# Altium PCB Commit.PcbDoc
Units mm, origin at the board's own origin, x right, y up, seen from the top; angles counter-clockwise.
Board outline 42 x 80 mm, 2 copper layers (Top Layer, Bottom Layer); 82 components, 52 nets, 246 pads, 237 vias.
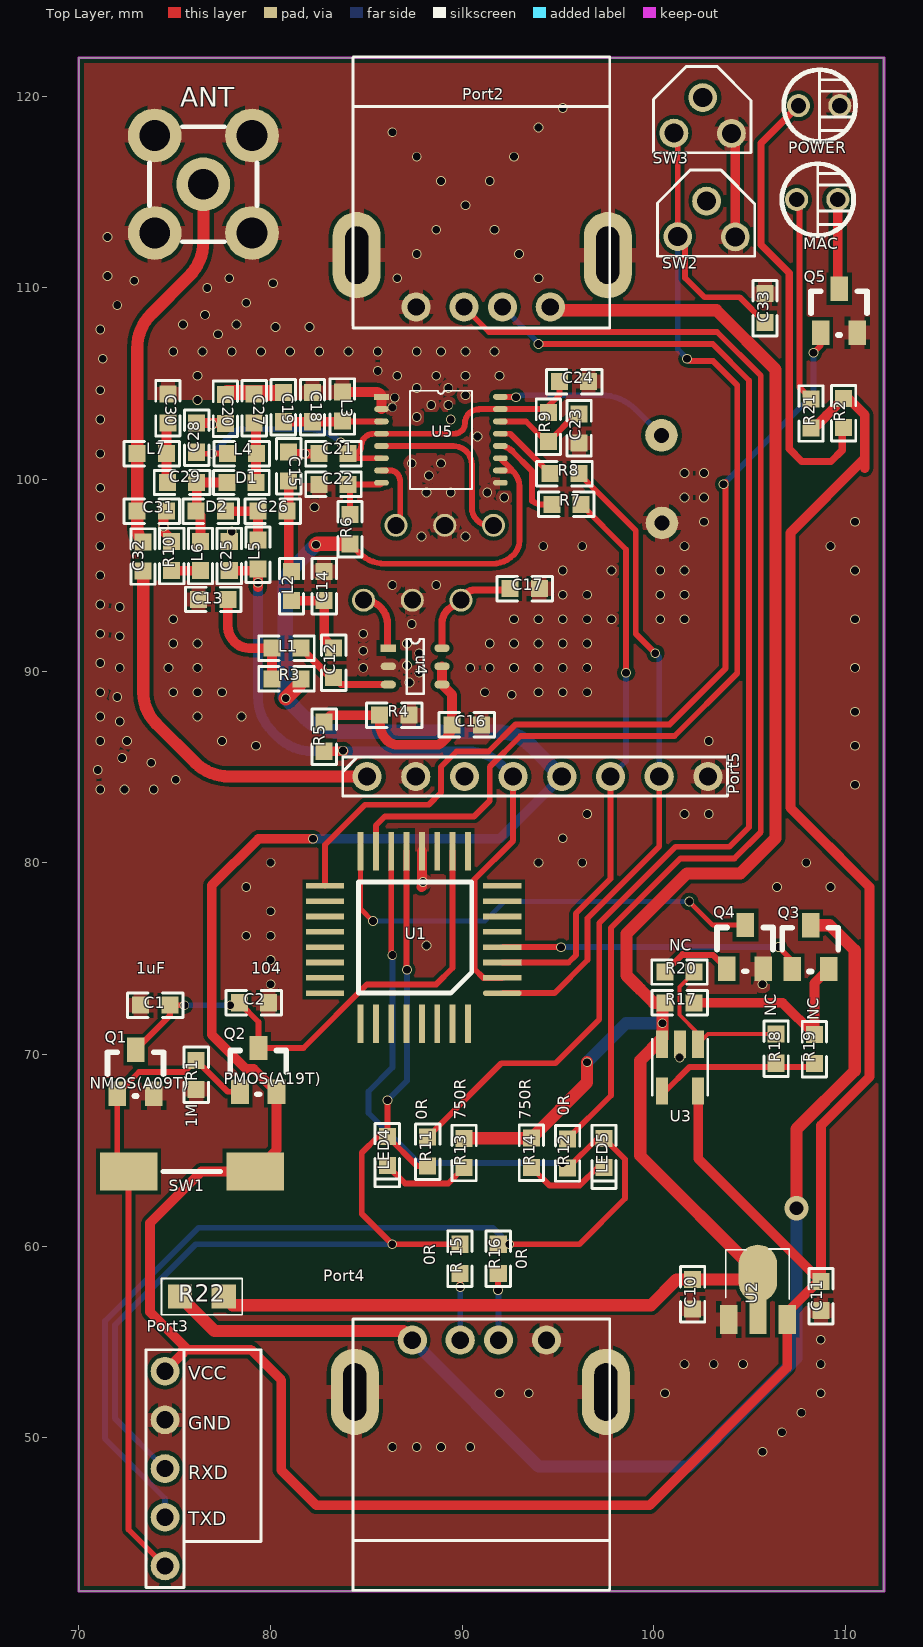
[diagram p0: Top Layer view]
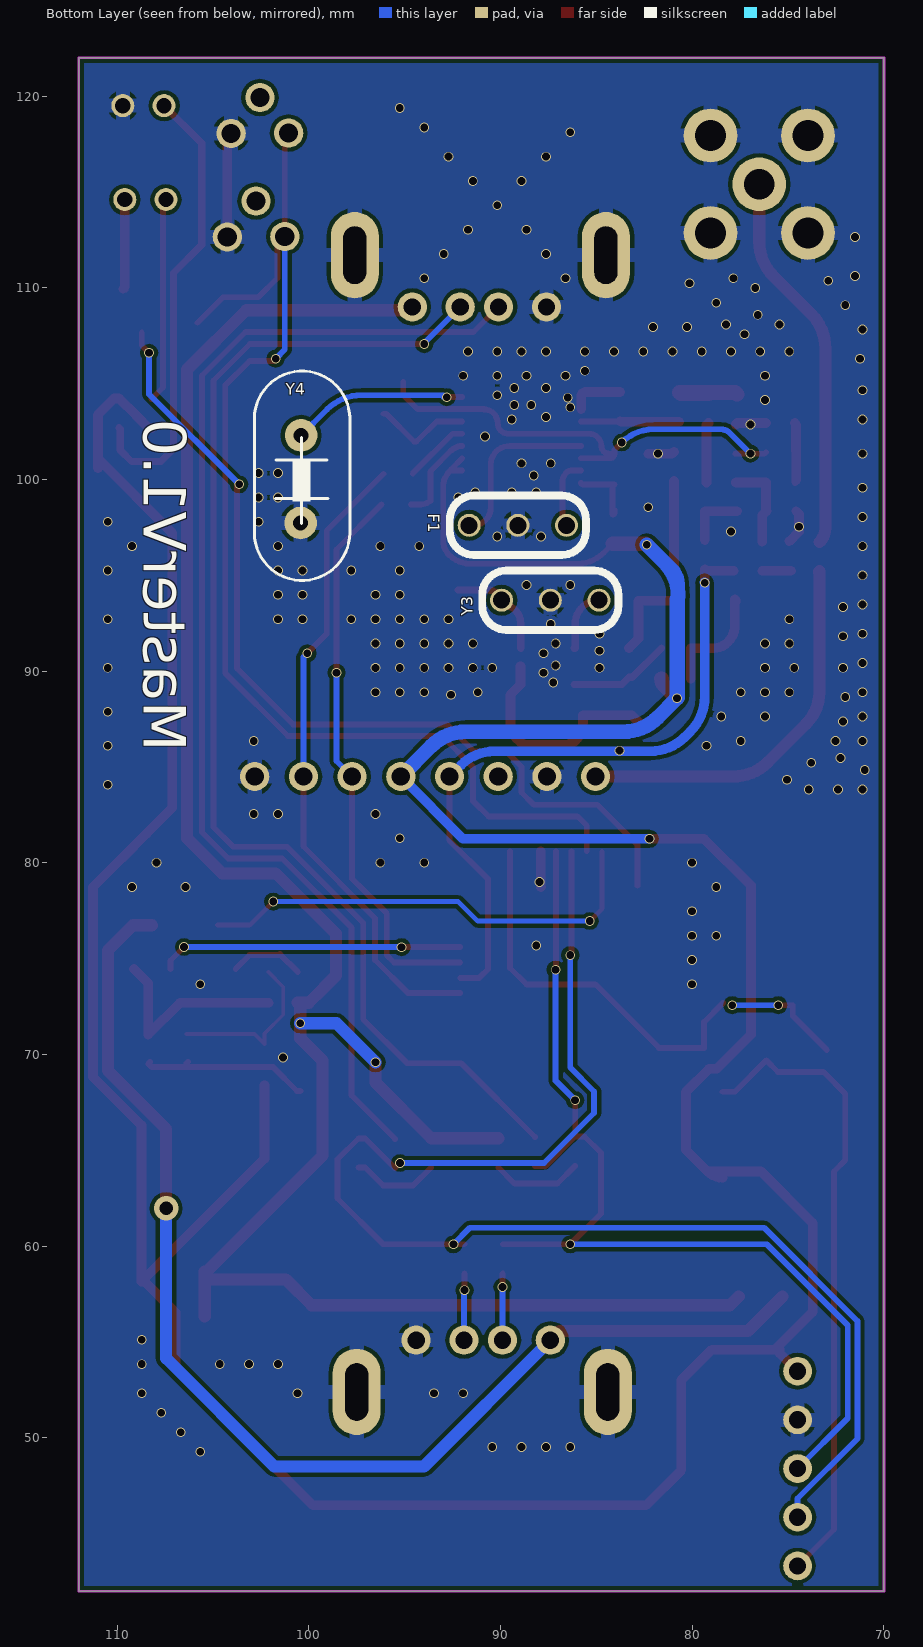
[diagram p1: Bottom Layer view, seen from below]

## Layer stack, top to bottom
Top Layer: signal copper 0.0356
Dielectric: dielectric 0.32, FR-4, Dk 4.8
Bottom Layer: signal copper 0.0356

## Board outline
70,42 112,42 112,122 70,122

## Design rules (kind name [scope] priority, off if disabled: settings)
Clearance [All] p1: gap=0.203
ComponentClearance [All] p1: gap=0 collisioncheckmode=3 verticalgap=0 showdistances=FALSE
MinimumSolderMaskSliver [All] p1: minsoldermaskwidth=0
PolygonConnect [All] p1: connectstyle=Relief reliefconductorwidth=0.762 reliefentries=4 polygonreliefangle="90 Angle"
RoutingVias [All] p1: holewidth=1.27 width=2.54 viastyle="Through Hole" minholewidth=0.025 minwidth=0.254 maxholewidth=0.711 maxwidth=1.27
SilkToSilkClearance [All] p1: silktosilkclearance=0
SilkscreenOverComponentPads [All] p1: minsilkscreentomaskgap=0
SolderMaskExpansion [All] p1: expansion=0.102
Width [All] p1: maxlimit=0.762 minlimit=0.178 preferedwidth=0.381
24 further rules are at their usual default settings.

## Components (designator, comment, footprint, x,y, rotation, side; value= is the part's Value field where it differs from the comment)
ANT "SMA" SWA-KE天线母座 76.5,115.4 r0 top
C1 "1uF" 0603 73.228,72.572 r0 top
C2 "104" 0603 79.9,72.7 r180 top
C10 "1uF" 0603 102.022,58.258 r270 top
C11 "104" 0603 108.722,58.158 r270 top
C12 "220pF5%" 0603 83.3,91.2 r270 top
C13 "104" 0603 76.25,93.742 r0 top
C14 "4.7pF5%" 0603 82.8,95.2 r270 top
C15 "12pF5%" 0603 80.95,101.442 r270 top
C16 "104" 0603 91,87.2 r180 top
C17 "1pF+-0.25p" 0603 92.5,94.3 r0 top
C18 "NC" 0603 82.194,104.534 r270 top
C19 "1pF+-0.25p" 0603 80.67,104.534 r270 top
C20 "NC" 0603 77.65,104.442 r270 top
C21 "104" 0603 84.05,101.342 r180 top
C22 "104" 0603 84.05,99.742 r180 top
C23 "104" 0603 96.1,101.9 r90 top
C24 "104" 0603 96.6,105.1 r180 top
C25 "NC" 0603 77.85,95.242 r90 top
C26 "NC" 0603 79.35,98.342 r0 top
C27 "NC" 0603 79.15,102.942 r90 top
C28 "104" 0603 76.15,102.942 r270 top
C29 "220pF5%" 0603 76.15,99.842 r180 top
C30 "NC" 0603 74.65,102.942 r90 top
C31 "NC" 0603 73.05,98.342 r0 top
C32 "NC" 0603 73.35,96.742 r270 top
C33 "NC" 0603 105.8,109.7 r270 top
D1 "SMP1320" 0603 79.25,99.842 r180 top
D2 "SMP1320" 0603 77.65,98.342 r180 top
F1 "10.7M" "PT4450 XTAL" 89.093,97.607 r0 bottom
L1 "180nH5%" 0603 81.6,91.2 r180 top
L2 "22nH5%" 0603 81.1,95.2 r270 top
L3 "47nH5%" 0603 83.75,103.042 r90 top
L4 "180nH5%" 0603 77.75,101.342 r0 top
L5 "180nH5%" 0603 79.35,96.842 r270 top
L6 "180nH5%" 0603 76.35,95.242 r90 top
L7 "0R" 0603 73.05,101.342 r0 top
LED4 "RX" LED-0603 86.1,64.2 r90 top
LED5 "TX" LED-0603 97.4,64.1 r90 top
MAC "MAC" 2.54LED 109.8,114.6 r0 top
Port2 "USB_A" USB-A 91.1,109 r180 top
Port3 "DEBUG" STC_DEBUG 74.5,48.4 r0 top
Port4 "USB_B" USB-A 90.9,55.1 r0 top
Port5 "Mold" Pin-8 95.2,84.5 r90 top
POWER "POWER" 2.54LED 109.9,119.5 r0 top
Q1 "NMOS(A09T)" SOT-23 72.9,69.1 r0 top
Q2 "PMOS(A19T)" SOT-23 79.3,69.2 r0 top
Q3 "AO3407(P)" SOT-23 108.1,75.6 r0 top
Q4 "NC" SOT-23 104.7,75.61 r0 top
Q5 "NMOS(A09T)" SOT-23 109.6,108.8 r0 top
R1 "1M" 0603 76.128,68.172 r90 top
R2 "2.2K" 0603 109.9,102.7 r90 top
R3 "0R" 0603 81.6,89.6 r180 top
R4 "100k" 0603 85.7,87.7 r0 top
R5 "0R" 0603 82.8,85.821 r90 top
R6 "10R" 0603 84.15,96.642 r90 top
R7 "10K" 0603 96.2,98.7 r180 top
R8 "10K" 0603 96.1,100.3 r180 top
R9 "5.1M" 0603 94.5,103.5 r270 top
R10 "3.3K" 0603 74.85,95.242 r90 top
R11 "0R" 0603 88.2,65.7 r270 top
R12 "0R" 0603 95.5,65.6 r270 top
R13 "750R" 0603 90.1,64.1 r90 top
R14 "750R" 0603 93.614,64.111 r90 top
R16 "0R" 0603 91.884,58.577 r90 top
R17 "NC" 0603 102.106,72.698 r180 top
R18 "NC" 0603 106.379,69.543 r90 top
R19 "NC" 0603 108.379,71.043 r270 top
R20 "NC" 0603 102.1,74.3 r180 top
R21 "0R" 0603 108.2,104.2 r270 top
R22 "0R" 0805 76.3,57.5 r180 top
"R 15" "0R" 0603 89.884,58.577 r90 top
SW1 "REST" SW-1 77.4,61.9 r270 top
SW2 "REST" Key1 104.2,112.6 r180 top
SW3 "REST" Key1 104,118 r180 top
U1 "STC8F2K32S2" LQPF-32 91.2,72.3 r180 top
U2 "HT7533-1" 3A5A3D 105.43,56.182 r0 top
U3 "NC" AD8628 101.3,69.4 r180 top
u4 "PT4450" PT4450 86.1,91.1 r270 top
U5 "PT4302" PT4302 85.793,104.307 r0 top
Y3 "433.92M" "PT4450 XTAL" 87.4,93.7 r180 bottom
Y4 "13.226M" "PT4306 XTAL" 100.4,102.3 r270 bottom

## Footprints (in the part's own frame and the unit in brackets; to place one, negate y for a bottom-side part, rotate by r counter-clockwise, add the part's x,y. Pads: shape width x height; smd on the part's side, far side on the other; paste and mask are expansions set on the pad)
2.54LED [mm]
  round 1.2 hole 0.8: 1(-2.35,0) 2(-0.2,0)
  silkscreen extent -3.12,-1.87 0.62,1.9
3A5A3D [mm]
  rect 0.9x1.5 smd: 1(-1.524,0) 3(1.524,0)
  rect 0.9x1.8 smd: 2(0,0.15)
  oval 2x3 smd: 2(0,2.4)
  silkscreen extent -1.68,1.07 1.63,3.67
0603 [mil]
  rect 35x35 smd: 1(0,0) 2(60,0)
  silkscreen extent -27,-25 87,25
0805 [mil]
  rect 50x50 smd: 1(-50,5) 2(40,5)
  silkscreen extent -88,-32 78,42
AD8628 [mil]
  rect 24x56 smd: 1(-39.61,-44.88) 2(-2.61,-44.88) 3(34.39,-44.88) 4(34.39,51.12) 5(-39.61,51.12)
  silkscreen extent -60,-55 54,60
Key1 [mm]
  round 1.5 / inner round 1.524 / far side round 1.524 hole 1: 1(2.95,-0.067) 2(-0.05,-0.05) ""(1.45,-1.92)
  silkscreen extent -1.07,-3.55 4.01,0.95
LED-0603 [mil]
  rect 35x35 smd: 1(0,0) 2(60,0)
  silkscreen extent -43,-25 87,25
LQPF-32 [mm]
  oct 2x0.3 smd: 1(-0.9,-0.9)
  rect 2x0.3 smd: 2(-0.9,-1.7) 3(-0.9,-2.5) 4(-0.9,-3.3) 5(-0.9,-4.1) 6(-0.9,-4.9) 7(-0.9,-5.7) 8(-0.9,-6.5) 17(8.35,-6.5) 18(8.35,-5.7) 19(8.35,-4.9) 20(8.35,-4.1) 21(8.35,-3.3) 22(8.35,-2.5) 23(8.35,-1.7) 24(8.35,-0.9)
  rect 0.3x2 smd: 9(0.9,-8.3) 10(1.7,-8.3) 11(2.5,-8.3) 12(3.3,-8.3) 13(4.1,-8.3) 14(4.9,-8.3) 15(5.7,-8.3) 16(6.5,-8.3) 25(6.5,0.7) 26(5.7,0.7) 27(4.9,0.7) 28(4.1,0.7) 29(3.3,0.7) 30(2.5,0.7) 31(1.7,0.7) 32(0.9,0.7)
  silkscreen extent 0.7,-6.7 6.6,-0.9
Pin-8 [mil]
  round 60 hole 37.4: 1(0,400) 2(0,300) 3(0,200) 4(0,100) 5(0,0) 6(0,-100) 7(0,-200) 8(0,-300)
  silkscreen extent -40,-340 40,450
PT4302 [mil]
  rect 30x12 smd: 1(0,0)
  oval 30x12 smd: 2(0,-25.2) 3(0,-50.39) 4(0,-75.59) 5(0,-100.79) 6(0,-125.98) 7(0,-151.18) 8(0,-176.38) 9(244.09,-176.38) 10(244.09,-151.18) 11(244.09,-125.98) 12(244.09,-100.79) 13(244.09,-75.59) 14(244.09,-50.39) 15(244.09,-25.2) 16(244.09,0)
  silkscreen extent 58,-189 186,13
"PT4306 XTAL" [mm]
  round 1.7 hole 0.787: 1(0,0) 2(4.572,-0.025)
  silkscreen extent -3.35,-2.44 7.57,2.54
PT4450 [mm]
  rect 0.4x0.8 smd: 1(-0.1,0.05)
  oval 0.4x0.8 smd: 2(0.85,0.05) 3(1.8,0.05) 4(1.8,2.85) 5(0.85,2.85) 6(-0.1,2.85)
  silkscreen extent -0.57,1 2.28,1.89
"PT4450 XTAL" [mm]
  round 1.2 hole 0.889: 1(-2.54,0) 2(0,0) 3(2.54,0)
  silkscreen extent -3.56,-1.55 3.56,1.55
SOT-23 [mil]
  rect 36x50 smd: 1(40,-45) 2(-35,-45) 3(3,45)
  silkscreen extent -55,-50 60,40
STC_DEBUG [mm]
  round 1.5 hole 0.9: 1(0,5.08) 2(0,2.54) 3(0,0) 4(0,-2.54) 5(0,-5.08)
  silkscreen extent -1,-6.2 5,6.2
SW-1 [mm]
  rect 2x3 smd: 1(-2,1.8) 2(-2,-4.8)
  silkscreen extent -2,-3 -2,0
SWA-KE天线母座 [mm]
  round 2.8 hole 1.6: 1(0,0) 2(-2.54,-2.54) 2(-2.54,2.54) 2(2.54,-2.54) 2(2.54,2.54)
  silkscreen extent -2.8,-3 2.8,3
USB-A [mm]
  round 1.524 hole 0.9: 1(-3.5,0) 2(-1,0) 3(1,0) 4(3.5,0)
  oval 2.5x4.5 hole 1.2 slot 3 at 90 deg: 4(-6.5,-2.7) 4(6.6,-2.7)
  silkscreen extent -6.6,-13.05 6.8,1.1

## Part data
ANT L1 L2 L3 R1 R2 R3 R4 R5 R6 R7 R8 R9 R10 R11 R12 R13 R14 R16 R17 R18 R19 R20 R21 R22 "R 15": library part Res2, "Resistor"
C1 C2 C10 C11 C12 C13 C14 C15 C16 C17 C18 C19 C20 C21 C22 C23 C24 C25 C26 C27 C28 C29 C30 C31 C32 C33: library part Cap, "Capacitor"
D1 D2 LED4 LED5 MAC POWER: library part DIODE, "diode"
F1: library part Filter
L4 L5 L6 L7: library part L, "Inductor"
Port2 Port4: library part USB
Port3: library part PIN-5
Port5: library part Pin-8
Q1 Q5: library part MOSFET-N, "mosfet"
Q2 Q3: library part MOSFET-P, "mosfet"
Q4: library part 2N3904, "NPN General Purpose Amplifier"
SW1 SW2 SW3: library part SW-P, "key"
U1: library part STC8F2K64S2
U3: library part AD8628
Y3: library part PT4450-XTAL
Y4: library part XTAL, "Crystal Oscillator"

## Via types
v1: diameter 0.508, hole 0.406, Top Layer to Bottom Layer, 236 vias
v2: diameter 1.27, hole 0.711, Top Layer to Bottom Layer, 1 vias

## Nets (pads, with @x,y where several pads share a name; then routed paths per layer and width w, separated by ;. In a path a pad name is that pad's centre, name@x,y a point inside that pad or via, vN(x,y) a via of type N, cw(c..) or ccw(c..) an arc to the next point about the centre after c; other vN are vias at no path point)
ANT: ANT.1 C31.1 C32.1 L7.1 | length 19.9
  Top Layer w0.635: C32.1 cw(c74.074,97.466) 73.05,97.466 C31.1 L7.1 73.05,106.84 cw(c75.59,106.84) 73.794,108.637 75.756,110.599 ccw(c73.96,112.395) 76.5,112.395 ANT.1
CEOUT: Q3.2 U1.4 | length 17
  Top Layer w0.305: U1.4 v1(95.158,75.6) ; v1(106.508,75.61) 107.211,74.907 Q3.2
  Bottom Layer w0.305: v1(95.158,75.6) 97.145,75.6 ; 105.664,75.61 105.156,75.61 ; v1(106.508,75.61) 105.156,75.61 ; 97.145,75.6 97.155,75.61 97.79,75.61 ; 97.145,75.6 97.78,75.6 97.79,75.61 ; 97.79,75.61 105.156,75.61
CNET: Q4.3 U1.16 | length 24.3
  Top Layer w0.254: U1.16 84.7,77.606 v1(85.344,76.962) ; v1(101.854,77.978) 103.079,76.753 Q4.3
  Bottom Layer w0.254: v1(85.344,76.962) 91.186,76.962 92.202,77.978 v1(101.854,77.978)
GND: ANT.2 C1.1 C2.1 C10.2 C11.2 C13.1 C14.1 C15.1 C16.1 C17.2 C18.1 C20.2 C21.2 C22.2 C23.1 C24.1 C25.2 C28.1 C30.2 C31.2 C33.1 F1.2 L3.2 Port2.4 Port3.2 Port4.4 Port5.2 Port5.8 POWER.2 Q1.1 Q4.1 Q5.1 R1.1 R4.2 R10.2 SW2.2 SW3.2 U1.12 U2.1 U3.2 u4.2 U5.1 U5.2 U5.9 Y3.2 Y4.2 | length 15
  Top Layer w0.508: C31.2 74.422,98.19 v1(74.422,97.536) 74.422,97.282 R10.2@74.93,96.774 ; C28.1 77.652,102.942 C20.2@77.724,102.87 ; C15.1 81.046,101.346 C21.2@82.296,101.346 ; L3.2 85.534,104.566 cw(c85.534,104.307) U5.1 U5.2 ; 87.884,78.74 ccw(c87.884,78.756) 87.9,78.756 U1.12 ; SW3.2 104.25,117.85 SW2.2
  other v1: 105.664,49.276 86.36,49.53 87.63,49.53 88.9,49.53 90.424,49.53 106.68,50.292 107.696,51.308 91.948,52.324 93.472,52.324 100.584,52.324 108.712,52.324 101.6,53.848 103.124,53.848 104.648,53.848 108.712,53.848 108.712,55.118 101.346,69.85 80.01,73.66 105.664,73.66 80.01,74.93 88.138,75.692 78.74,76.2 80.01,76.2 80.01,77.47 78.74,78.74 106.426,78.74 109.22,78.74 87.96,79 80.01,80.01 93.98,80.01 96.266,80.01 107.95,80.01 95.25,81.28 96.52,82.55 101.6,82.55 102.87,82.55 71.12,83.82 72.39,83.82 73.914,83.82 110.49,84.074 75.057,84.328 70.993,84.836 73.787,85.217 72.263,85.471 79.248,86.106 110.49,86.106 71.12,86.36 72.517,86.36 77.47,86.36 102.87,86.36 72.136,87.376 71.12,87.63 76.2,87.63 78.486,87.63 110.49,87.884 72.009,88.646 92.583,88.773 71.12,88.9 74.93,88.9 76.2,88.9 77.47,88.9 91.186,88.9 93.98,88.9 95.25,88.9 96.52,88.9 87.249,89.408 87.757,89.916 72.136,90.17 74.676,90.17 76.2,90.17 84.836,90.17 90.424,90.17 91.44,90.17 92.71,90.17 93.98,90.17 95.25,90.17 96.52,90.17 110.49,90.17 87.122,90.297 71.12,90.424 87.757,90.932 84.836,91.059 74.93,91.44 76.2,91.44 87.122,91.44 91.44,91.44 92.71,91.44 93.98,91.44 95.25,91.44 96.52,91.44 72.136,91.821 71.12,91.948 84.836,91.948 87.376,92.456 74.93,92.71 92.71,92.71 93.98,92.71 95.25,92.71 96.52,92.71 97.79,92.71 100.33,92.71 101.6,92.71 110.49,92.71 72.136,93.345 71.12,93.472 95.25,93.98 96.52,93.98 100.33,93.98 101.6,93.98 86.36,94.488 88.646,94.488 71.12,94.996 95.25,95.25 97.79,95.25 100.33,95.25 101.6,95.25 110.49,95.25 71.12,96.52 94.234,96.52 96.266,96.52 101.6,96.52 109.22,96.52 87.884,97.028 90.17,97.028 77.978,97.282 102.616,97.79 110.49,97.79 71.12,98.044 82.296,98.552 92.202,99.06 101.6,99.06 102.616,99.06 88.138,99.314 89.408,99.314 91.313,99.314 71.12,99.568 88.265,100.203 101.6,100.33 102.616,100.33 87.376,100.838 88.9,100.838 71.12,101.346 81.788,101.346 90.805,102.235 76.962,102.87 71.12,103.124 89.408,103.124 87.63,103.251 86.36,103.759 88.392,103.886 89.281,103.886 76.2,104.14 86.487,104.267 90.17,104.394 71.12,104.648 87.63,104.775 89.281,104.775 76.2,105.41 86.614,105.41 88.646,105.41 90.17,105.41 91.948,105.41 85.598,105.664 71.247,106.299 74.93,106.68 76.454,106.68 77.978,106.68 79.502,106.68 81.026,106.68 82.55,106.68 84.074,106.68 85.598,106.68 87.63,106.68 88.9,106.68 90.17,106.68 91.694,106.68 77.267,107.569 71.12,107.823 80.264,107.95 82.042,107.95 75.438,108.077 78.232,108.077 76.581,108.585 72.009,109.093 78.74,109.22 76.708,109.982 80.137,110.236 72.898,110.363 77.851,110.49 86.614,110.49 93.98,110.49 71.501,110.617 87.63,111.76 92.964,111.76 71.501,112.649 88.646,113.03 91.694,113.03 90.17,114.3 88.9,115.57 91.44,115.57 87.63,116.84 92.71,116.84 86.36,118.11 93.98,118.364 95.25,119.38
NetC12_1: C12.1 C14.2 L2.2 | length 4.4
  Top Layer w0.508: L2.2 C14.2 82.8,91.7 C12.1
NetC12_2: C12.2 L1.1 u4.3 | length 5.3
  Top Layer w0.381: L1.1 83.124,89.676 C12.2 83.676,89.3 u4.3
NetC13_2: C13.2 L1.2 R3.2 | length 6.1
  Top Layer w0.508: C13.2@77.722,93.616 cw(c77.9,93.616) C13.2 77.774,92.385 ccw(c79.013,92.385) 78.137,91.509 ccw(c78.882,92.254) 78.882,91.2 L1.2 R3.2
NetC16_2: C16.2 R4.1 R5.2 u4.4 u4.5 | length 11.8
  Top Layer w0.508: R5.2 83.155,87.7 R4.1 85.7,87.316 ccw(c87.016,87.316) 86.085,86.386 ccw(c86.646,86.946) 86.646,86.154 88.637,86.154 ccw(c88.637,86.578) 88.937,86.278 89.205,86.546 ccw(c88.551,87.2) C16.2 89.476,88.774 u4.4 u4.5
NetC17_1: C17.1 u4.6 Y3.1 | length 5.8
  Top Layer w0.381: u4.6 88.95,92.506 cw(c89.916,92.506) 89.916,93.472 cw(c90.678,93.472) 90.678,94.234 C17.1@92.202,94.234
  Top Layer w0.762: Y3.1 Y3.1@90.096,93.856
NetC18_2: C18.2 C19.2 L3.1 U5.3 | length 5.2
  Top Layer w0.305: L3.1@83.718,103.01 cw(c83.735,103.01) 83.735,103.027 U5.3
  Top Layer w0.508: C19.2 C18.2 83.718,103.01 L3.1
NetC22_1: C22.1 R6.2 U5.8 | length 5.6
  Top Layer w0.305: U5.8 cw(c85.708,99.827) 85.708,99.742 C22.1 ; R6.2@84.05,98.266 ccw(c84.15,98.266) R6.2 ; R6.2@84.05,98.266 ccw(c84.15,98.266) R6.2 ; R6.2@84.05,98.266 ccw(c84.15,98.266) R6.2 ; R6.2@84.05,98.266 ccw(c84.15,98.266) R6.2 ; C22.1 cw(c84.05,99.642) C22.1@84.15,99.642 ; C22.1 cw(c84.05,99.642) C22.1@84.15,99.642 ; C22.1 cw(c84.05,99.642) C22.1@84.15,99.642 ; C22.1 cw(c84.05,99.642) C22.1@84.15,99.642 ; C22.1 cw(c84.05,99.642) C22.1@84.15,99.642 ; C22.1 cw(c84.05,99.642) C22.1@84.15,99.642 ; C22.1 84.15,99.742 R6.2 ; R6.2 cw(c84.391,98.407) 84.05,98.407 ccw(c84.391,98.407) R6.2
NetC23_2: C23.2 R9.2 U5.14 | length 5.1
  Top Layer w0.305: U5.14 93.326,103.027 94.377,101.976 94.512,101.976 95.96,103.424 C23.2
NetC26_1: C26.1 D2.1 L5.1 | length 3.2
  Top Layer w0.508: D2.1 C26.1 L5.1
NetC27_1: C27.1 D1.1 L4.2 | length 3.1
  Top Layer w0.508: C27.1 79.25,102.842 D1.1
NetC29_1: C29.1 D1.2 D2.2 L6.2 | length 5
  Top Layer w0.381: C29.1@76.126,99.784 cw(c76.208,99.784) C29.1 ccw(c76.208,99.784) C29.1@76.126,99.784
  Top Layer w0.508: L6.2 76.35,98.118 D2.2 ; D1.2 C29.1 76.15,98.366 D2.2 ; D2.2 ccw(c76.068,98.4) 76.15,98.4 cw(c76.068,98.4) D2.2
NetC29_2: C29.2 C30.1 L7.2 | length 5
  Top Layer w0.381: C29.2@74.574,99.968 ccw(c74.751,99.968) C29.2 ; L7.2 ccw(c74.39,101.526) 74.65,101.526 C30.1
  Top Layer w0.508: C29.2@74.574,99.968 L7.2 C30.1@74.574,102.759 ; C30.1@74.574,102.759 cw(c74.833,102.759) C30.1 ccw(c74.833,102.759) C30.1@74.574,102.759
NetC32_2: C32.2 Port5.1 | length 20.3
  Top Layer w0.635: C32.2@73.387,95.128 ccw(c73.26,95.128) C32.2 cw(c73.313,95.181) 73.365,95.181 73.365,88.901 ccw(c75.691,88.901) 74.047,87.256 76.059,85.244 ccw(c77.855,87.04) 77.855,84.5 Port5.1
NetC33_2: C33.2 SW2.1 SW3.1 U1.15 | length 62.2
  Top Layer w0.305: U1.15 85.5,81.944 85.979,82.423 90.627,82.423 91.441,83.237 91.441,85.005 93.05,86.614 101.079,86.614 104.356,89.891 104.356,104.914 103.098,106.172 101.854,106.172 v1(101.727,106.299) ; SW3.1@101.25,117.867 SW2.1 101.633,112.667 101.633,110.508 102.64,109.501 104.475,109.501 C33.2
  Bottom Layer w0.305: SW2.1 101.25,106.776 v1(101.727,106.299)
NetF1_1: F1.1 U5.7 | length 3.7
  Top Layer w0.305: U5.7 86.264,100.467 cw(c86.264,100.024) 86.577,100.337 cw(c86.107,99.867) 86.772,99.867 86.772,98.399 86.772,98.137 cw(c86.023,98.137) F1.1
NetF1_3: F1.3 U5.5 | length 9.2
  Top Layer w0.305: U5.5 89.532,101.747 cw(c89.532,100.771) 90.508,100.771 ccw(c90.508,100.769) 90.506,100.769 90.506,98.524 ccw(c91.423,98.524) 91.423,97.607 F1.3
NetL6_1: L6.1 R10.1 | length 1.5
  Top Layer w0.508: R10.1 L6.1
NetLED4_1: LED4.1 R13.1 | length 4.7
  Top Layer w0.305: LED4.1 87.026,63.274 89.274,63.274 R13.1
NetLED5_1: LED5.1 R14.1 | length 4.6
  Top Layer w0.305: R14.1 94.551,63.174 96.134,63.174 97.06,64.1 LED5.1
NetMAC_1: MAC.1 R21.1 | length 10.7
  Top Layer w0.305: MAC.1 107.607,114.443 107.607,104.793 R21.1
NetMAC_2: MAC.2 Q5.3 | length 5
  Top Layer w0.508: MAC.2@109.376,114.376 MAC.2 109.6,110.019 Q5.3
NetPort2_2: Port2.2 R11.1 | length 64.2
  Top Layer w0.305: R11.1 92.045,69.545 94.869,69.545 97.155,71.831 97.155,76.859 101.132,80.835 103.948,80.835 104.965,81.853 104.965,105.167 103.071,107.061 v1(93.98,107.061)
  Bottom Layer w0.305: Port2.2 93.98,107.12 v1(93.98,107.061)
NetPort2_3: Port2.3 R12.1 | length 62.6
  Top Layer w0.305: Port2.3 91.404,107.696 103.298,107.696 105.575,105.419 105.575,81.601 104.2,80.226 101.384,80.226 97.765,76.606 97.765,67.865 R12.1
NetPort4_2: "R 15.1" Port4.2 | length 3.5
  Top Layer w0.305: 89.884,58.577 89.9,58.561 v1(89.9,57.875)
  Bottom Layer w0.305: Port4.2 v1(89.9,57.875)
NetPort4_3: Port4.3 R16.1 | length 3.5
  Top Layer w0.305: v1(91.872,57.709) 91.872,58.565 R16.1
  Bottom Layer w0.305: v1(91.872,57.709) 91.9,57.681 Port4.3
NetPOWER_1: POWER.1 R2.1 | length 23.8
  Top Layer w0.381: POWER.1 105.588,117.538 105.588,112.243 107.061,110.769 107.061,101.6 107.721,100.94 109.245,100.94 109.83,101.524 109.83,102.63 R2.1
NetQ3_1: Q3.1 R17.1 R19.1 | length 10.7
  Top Layer w0.508: R17.1 106.724,72.698 R19.1 108.379,73.72 Q3.1
NetQ4_2: Q4.2 R20.2 | length 5.2
  Top Layer w0.305: 101.499,75.235 100.576,74.312 R20.2 101.46,75.184 103.094,75.184 Q4.2
NetQ5_2: Q5.2 U1.17 | length 47.5
  Top Layer w0.305: U1.17 82.85,80.945 84.938,83.033 88.265,83.033 88.901,83.668 88.901,85.005 89.701,85.805 91.379,85.805 92.797,87.224 100.827,87.224 103.746,90.143 103.746,99.86 v1(103.632,99.746) ; v1(108.331,106.604) 108.411,106.684 108.711,106.984 Q5.2
  Bottom Layer w0.305: v1(103.632,99.746) 108.331,104.445 v1(108.331,106.604)
NetR7_2: R7.2 U5.12 | length 5.5
  Top Layer w0.305: 92.619,101.488 ccw(c91.993,100.861) U5.12 cw(c91.993,100.984) 92.532,101.524 cw(c92.532,101.462) 92.576,101.506 93.624,100.457 cw(c93.563,100.396) 93.65,100.396 93.65,98.882 93.675,98.882 ccw(c94.115,99.322) 94.115,98.7 R7.2 R7.2@94.64,98.7
NetR8_2: R8.2 U5.13 | length 3.5
  Top Layer w0.305: U5.13 92.507,102.387 94.576,100.318 R8.2
NetR18_1: R18.1 R19.2 U3.4 | length 8.8
  Top Layer w0.305: U3.4 100.614,68.102 101.854,69.342 108.202,69.342 R19.2 R19.2@108.276,69.621 ; R18.1@106.3,69.621 R18.1
NetR18_2: R18.2 R20.1 U3.1 | length 8.8
  Top Layer w0.203: R20.1 101.332,73.532 101.332,72.074 102.306,71.1 U3.1 102.833,71.067 R18.2
Netu4_1: u4.1 Y3.3 | length 9.9
  Top Layer w0.381: u4.1@86.106,91.186 u4.1@86.106,91.244 ; Y3.3 cw(c84.86,92.454) 86.106,92.454 ; Y3.3 cw(c84.86,92.454) 86.106,92.454 ; Y3.3 cw(c84.86,92.454) 86.106,92.454 ; Y3.3 cw(c84.86,92.454) 86.106,92.454 ; u4.1@86.106,91.244 ccw(c86.15,91.244) u4.1 ; u4.1@86.106,91.244 ccw(c86.15,91.244) u4.1 ; u4.1@86.106,91.244 ccw(c86.15,91.244) u4.1 ; u4.1@86.106,91.244 ccw(c86.15,91.244) u4.1 ; u4.1@86.106,91.244 ccw(c86.15,91.244) u4.1 ; u4.1@86.106,91.244 ccw(c86.15,91.244) u4.1 ; u4.1@86.106,91.244 ccw(c86.15,91.244) u4.1 ; u4.1@86.106,91.244 ccw(c86.15,91.244) u4.1 ; u4.1@86.106,91.244 ccw(c86.15,91.244) u4.1 ; u4.1@86.106,91.244 ccw(c86.15,91.244) u4.1 ; u4.1@86.106,91.244 86.106,92.454
  Top Layer w0.762: Y3.3 Y3.3@84.956,93.604
NetU5_16: U5.16 Y4.1 | length 9.3
  Top Layer w0.305: U5.16 v1@92.809,104.307 ; v1(92.806,104.292) cw(c92.849,104.292) v1@92.809,104.307 ; v1@92.809,104.307 cw(c92.849,104.292) 92.849,104.335 cw(c92.821,104.335) 92.821,104.307 v1@92.809,104.307
  Bottom Layer w0.305: v1(92.806,104.292) v1@92.964,104.292 ; v1@92.964,104.394 97.254,104.394 cw(c97.254,101.854) 99.05,103.65 Y4.1
RFRXD: Port5.7 R8.1 U1.1 | length 33.8
  Top Layer w0.305: U1.1 94.815,73.2 96.545,74.93 96.545,77.111 100.28,80.846 Port5.7 ; R8.1 99.06,97.34 99.06,91.948 v1(100.076,90.932)
  Bottom Layer w0.305: v1(100.076,90.932) 100.28,90.728 Port5.7
RFTXD: C25.1 L5.2 Port5.4 R5.1 U1.2 | length 36.8
  Top Layer w0.305: U1.2 91.103,74 90.643,74.461 90.643,79.139 92.66,81.157 Port5.4
  Top Layer w0.508: C25.1 78.644,95.242 79.274,95.242 L5.2 79.35,94.386 cw(c79.334,94.386) 79.345,94.375 v1(79.345,94.614) ; R5.1 83.82,85.821 v1(83.789,85.852)
  Bottom Layer w0.508: v1@79.353,94.632 ccw(c79.372,94.614) v1(79.345,94.614) 79.345,88.655 ccw(c81.885,88.655) 80.089,86.859 80.378,86.57 ccw(c82.174,88.366) 82.174,85.826 ccw(c82.187,85.839) 82.187,85.821 82.804,85.821 90.313,85.821 cw(c90.313,83.343) 92.065,85.095
RX: C19.1 C20.1 C27.2 | length 4.7
  Top Layer w0.762: C20.1@77.708,104.466 ccw(c77.708,104.384) C20.1 77.742,104.534 C19.1 80.602,104.466 C27.2
RXCE: Port5.6 R7.1 U1.3 | length 29.7
  Top Layer w0.305: U1.3 95.553,74.8 95.936,75.183 95.936,77.364 97.111,78.539 97.74,79.168 Port5.6 Port5.6@97.652,84.412 ; R7.1 98.552,96.348 v1(98.552,89.916)
  Bottom Layer w0.305: Port5.6 98.552,85.312 98.552,87.376 v1(98.552,89.916)
RXD: "R 15.2" LED4.2 Port3.3 R11.2 U1.13 | length 53.5
  Top Layer w0.305: v1(86.106,67.615) 86.1,67.609 LED4.2 ; U1.13 87.1,74.444 v1(87.122,74.422) ; R11.2 87.66,64.176 86.112,65.724 LED4.2 ; 89.884,60.101 v1(86.355,60.101) 84.76,61.697 84.76,64.872 85.612,65.724 LED4.2
  Bottom Layer w0.305: Port3.3 71.882,51.018 71.882,55.879 76.104,60.101 v1(86.355,60.101) ; v1(86.106,67.615) 87.122,68.631 v1(87.122,74.422)
TRG: Port3.5 Q1.2 Q2.2 R1.2 SW1.2 | length 33.5
  Top Layer w0.305: Port3.5 72.6,45.22 SW1.2 72.011,64.489 Q1.2 73.142,69.088 75.52,69.088 R1.2 77.767,68.057 Q2.2
TX: C15.2 C26.2 L2.1 | length 4.8
  Top Layer w0.508: C15.2 80.95,95.35 L2.1
TXD: LED5.2 Port3.4 R12.2 R16.2 U1.14 | length 74.5
  Top Layer w0.305: U1.14 86.3,75.244 v1(86.36,75.184) ; R16.2 96.118,60.101 98.501,62.484 98.501,64.534 97.412,65.624 LED5.2 97.06,65.624 95.512,64.076 R12.2 v1(95.238,64.338)
  Bottom Layer w0.305: Port3.4 74.5,46.836 71.374,49.962 71.374,56.089 76.245,60.96 91.597,60.96 v1(92.456,60.101) ; v1(86.36,75.184) 86.36,69.317 85.115,68.072 85.115,66.954 87.732,64.338 v1(95.238,64.338)
V2: C21.1 C24.2 C28.2 L4.1 R9.1 U5.4 U5.6 U5.15 | length 34.4
  Top Layer w0.305: C28.2 76.226,101.342 L4.1 77.746,101.346 v1(76.962,101.346) ; v1(83.669,101.929) 84.05,101.548 C21.1 ; U5.6 84.852,101.107 84.285,101.107 cw(c84.285,101.342) C21.1 ; C24.2 95.076,104.41 94.333,103.667 U5.15 90.879,103.667 ccw(c90.879,103.657) 90.869,103.657 ccw(c90.869,102.932) 90.145,102.932 90.145,102.924 cw(c89.607,102.924) 89.607,102.387 U5.4 85.385,102.387 ccw(c85.385,101.738) 84.736,101.738 cw(c84.34,101.738) 84.34,101.342 C21.1
  Bottom Layer w0.305: v1@77.064,101.346 v1(76.962,101.346) 78.052,102.436 cw(c78.486,102.003) 78.486,102.616 82.01,102.616 ; 78.994,102.616 82.01,102.616 ; 82.01,102.616 cw(c82.01,100.27) v1(83.669,101.929) ; 82.01,102.616 cw(c82.01,100.27) v1(83.669,101.929) ; 82.01,102.616 cw(c82.01,100.27) v1(83.669,101.929) ; 82.01,102.616 cw(c82.01,100.27) v1(83.669,101.929)
VCC: C11.1 Port3.1 Port5.5 Q2.1 R2.2 R3.1 R6.1 R21.2 SW1.1 U2.3 U3.5 U5.10 U5.11 | length 219.9
  Top Layer w0.305: R6.1 84.626,96.166 ccw(c85.979,97.519) 85.979,95.606 91.581,95.606 ccw(c91.581,97.167) 92.685,96.063 ccw(c91.949,96.799) 92.989,96.799 92.989,99.645 ccw(c91.949,99.645) 92.685,100.381 ccw(c92.476,100.173) 92.476,100.467 U5.10 U5.10@92.126,100.467 ; U5.11 92.583,100.517 92.583,100.457
  Top Layer w0.508: Port3.1 75.438,54.418 75.438,54.61 ; SW1.1@78.418,63.576 ccw(c78.418,64.682) SW1.1 ; v1(82.22,81.255) 79.375,81.255 76.937,78.816 76.937,71.044 78.73,69.251 79.122,69.251 Q2.1 80.316,65.016 SW1.1 ; U3.5@102.312,68.4 102.312,64.568 C11.1 ; R21.2@108.209,102.667 108.343,102.667 108.998,103.322 108.998,103.334 109.888,104.224 R2.2 110.152,104.224 110.998,103.378 110.998,101.092 ; 109.728,80.264 108.458,81.534 ; 110.998,100.584 110.998,101.092 ; SW1.1 76.397,63.9 73.711,61.214 73.711,56.566 75.677,54.6 78.979,54.6 80.569,53.01 80.569,48.311 82.398,46.482 99.771,46.482 106.954,53.665 U2.3 106.954,56.546 108.567,58.158 C11.1 ; 108.458,81.534 111.252,78.74 111.252,68.834 108.722,66.304 C11.1 ; 108.458,81.534 107.124,82.867 107.124,97.218 110.998,101.092
  Top Layer w0.762: v1@80.793,88.584 cw(c80.796,88.584) v1(80.794,88.586) 81.453,89.246 ccw(c81.099,89.6) R3.1 ; v1(82.374,96.597) cw(c82.483,96.488) 82.483,96.642 R6.1
  Bottom Layer w0.508: v1(82.22,81.255) 91.955,81.255 Port5.5
  Bottom Layer w0.762: v1@80.823,88.656 cw(c80.724,88.656) v1@80.794,88.586 ; Port5.5 93.607,86.093 ccw(c91.811,84.297) 91.811,86.837 83.595,86.837 cw(c83.595,89.377) 81.799,87.581 v1(80.794,88.586) ; 80.748,93.861 ccw(c80.546,93.716) 80.721,93.892 cw(c83.261,93.892) 80.748,94.256 ; 80.748,93.861 cw(c80.546,93.716) 80.794,93.716 v1@80.794,88.586 ; 80.748,93.861 80.748,88.698 ccw(c80.905,88.698) v1(80.794,88.586) ; 80.748,93.861 80.748,94.256 ; 80.748,94.256 cw(c83.261,93.892) 81.465,95.688 v1(82.374,96.597) 81.075,95.298 ccw(c81.829,94.543) 80.763,94.543 80.763,94.354 cw(c80.712,94.354) 80.748,94.318 80.748,94.256
VCC_5V: C10.1 Port2.1 R13.2 R14.2 R17.2 R22.1 U2.2 U3.3 | length 113.8
  Top Layer w0.635: R22.1 78.022,56.921 99.847,56.921 101.184,58.258 105.106,58.258 105.43,58.582 99.289,64.723 99.289,69.694 100.433,70.838 100.445,70.851 R17.2@100.445,72.561 ; R13.2 90.111,65.635 R14.2 96.52,68.541 v1(96.52,69.596) ; Port2.1 94.772,108.828 103.262,108.828 106.35,105.74 106.35,81.28 104.521,79.451 101.727,79.451 98.577,76.302 98.577,74.117 99.2,73.494 ; 99.289,73.406 99.997,72.698 R17.2 R17.2@100.445,72.561 ; R17.2@100.433,72.548 R17.2@100.445,72.561 ; U2.2@105.43,56.332 U2.2@105.43,58.68
  Bottom Layer w0.635: v1(96.52,69.596) 98.552,71.628 v1(100.445,71.628)
VCORE: C1.2 C2.2 Q1.3 Q2.3 U1.10 | length 27
  Top Layer w0.305: Q1.3 74.752,72.019 C1.2 v1(75.51,72.572) ; v1(77.906,72.572) C2.2@77.978,72.644 ; C2.2 79.376,71.7 Q2.3 81.722,70.343 85.039,73.66 88.646,73.66 89.5,74.514 89.5,78.74 U1.10
  Bottom Layer w0.305: v1(75.51,72.572) v1(77.906,72.572)
VOUT: Port4.1 Q3.3 R22.2 | length 63.5
  Top Layer w0.635: R22.2 77.082,55.575 86.925,55.575 Port4.1 ; v2(107.442,61.976) 107.442,66.12 110.477,69.155 110.477,75.438 109.172,76.743 Q3.3
  Bottom Layer w0.635: Port4.1 93.986,48.514 98.044,48.514 101.803,48.514 107.442,54.153 v2(107.442,61.976)
pads on no net: Port5.3 SW2. SW3. U1.5 U1.6 U1.7 U1.8 U1.9 U1.11 U1.18 U1.19 U1.20 U1.21 U1.22 U1.23 U1.24 U1.25 U1.26 U1.27 U1.28 U1.29 U1.30 U1.31 U1.32

## Polygon pours and split planes (outlines as drawn)
GND on Top Layer "Top Layer-No Net" (solid, remove dead copper, pour order 1000): 67.31,126.492 66.802,125.984 66.802,39.116 127.508,39.116 130.048,36.576 121.412,45.212 121.412,128.524
GND on Bottom Layer "Top Layer-No Net" (solid, remove dead copper, pour order 1000): 65.786,129.286 cw(c65.173,128.673) 66.04,128.673 66.04,40.132 132.806,40.132 cw(c132.806,37.592) 134.602,39.388 135.89,38.1 117.076,56.914 cw(c118.872,58.71) 116.332,58.71 116.332,128.016

## Keep-outs
Keep-Out Layer:
  the board outline again, w0.152

## Other copper
Top Layer:
  pour cut-out: 84.836,104.14 73.152,104.14 73.152,94.742 80.772,94.742 80.518,94.996 80.518,99.822 84.836,99.822

## Silkscreen, mask and mechanical layers (free items; w line width, h text height)
Bottom Overlay:
  text "MasterV1.0" at 109.342,85.797 h3.81 r90

## Text inside footprints (layer, text, board x,y; h text height)
Port3: Top Overlay "VCC" at 75.7,52.8 h1.2; Top Overlay "GND" at 75.7,50.2 h1.2; Top Overlay "RXD" at 75.7,47.6 h1.2; Top Overlay "TXD" at 75.7,45.2 h1.2